# Altium PCB CC1101-Module.PcbDoc
Units mm, origin at the board's own origin, x right, y up, seen from the top; angles counter-clockwise.
Board outline 29.2 x 15.2 mm, 2 copper layers (Top Layer, Bottom Layer); 24 components, 19 nets, 80 pads, 47 vias.
Unrouted connection lines stored in the file: 23.
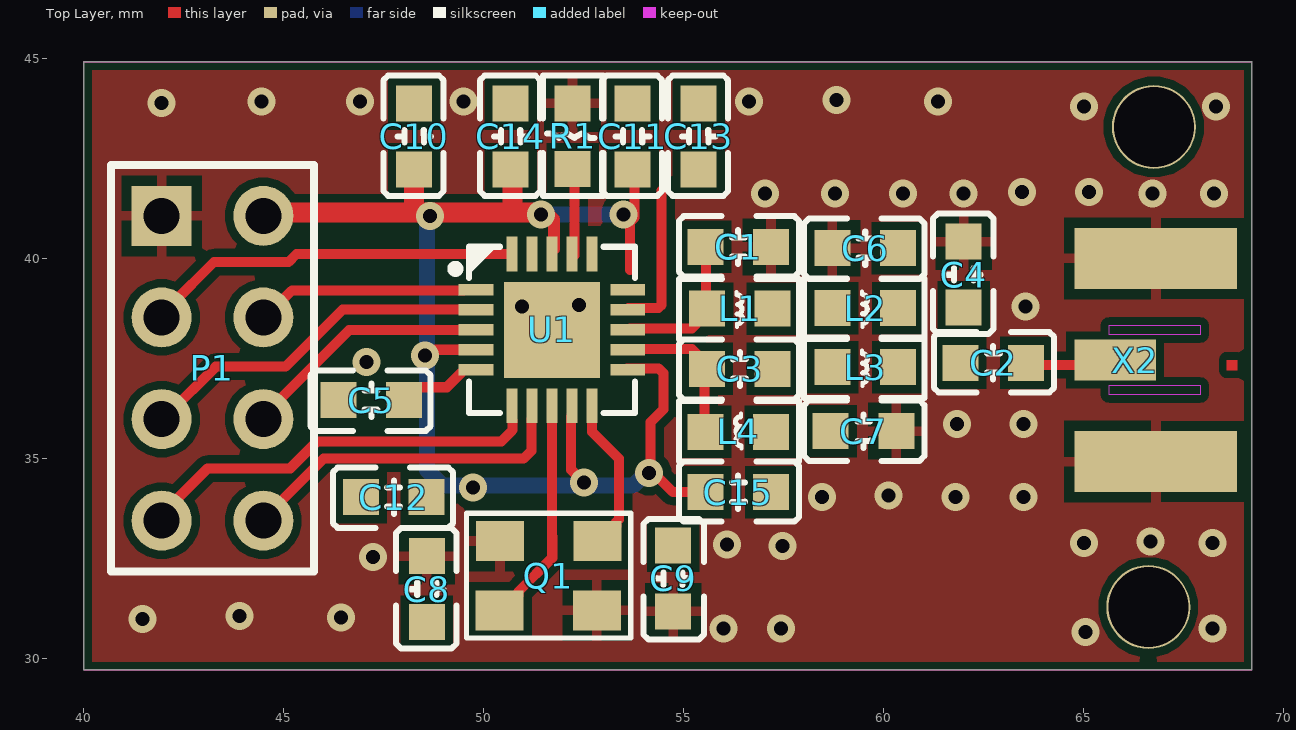
[diagram p0: Top Layer view]
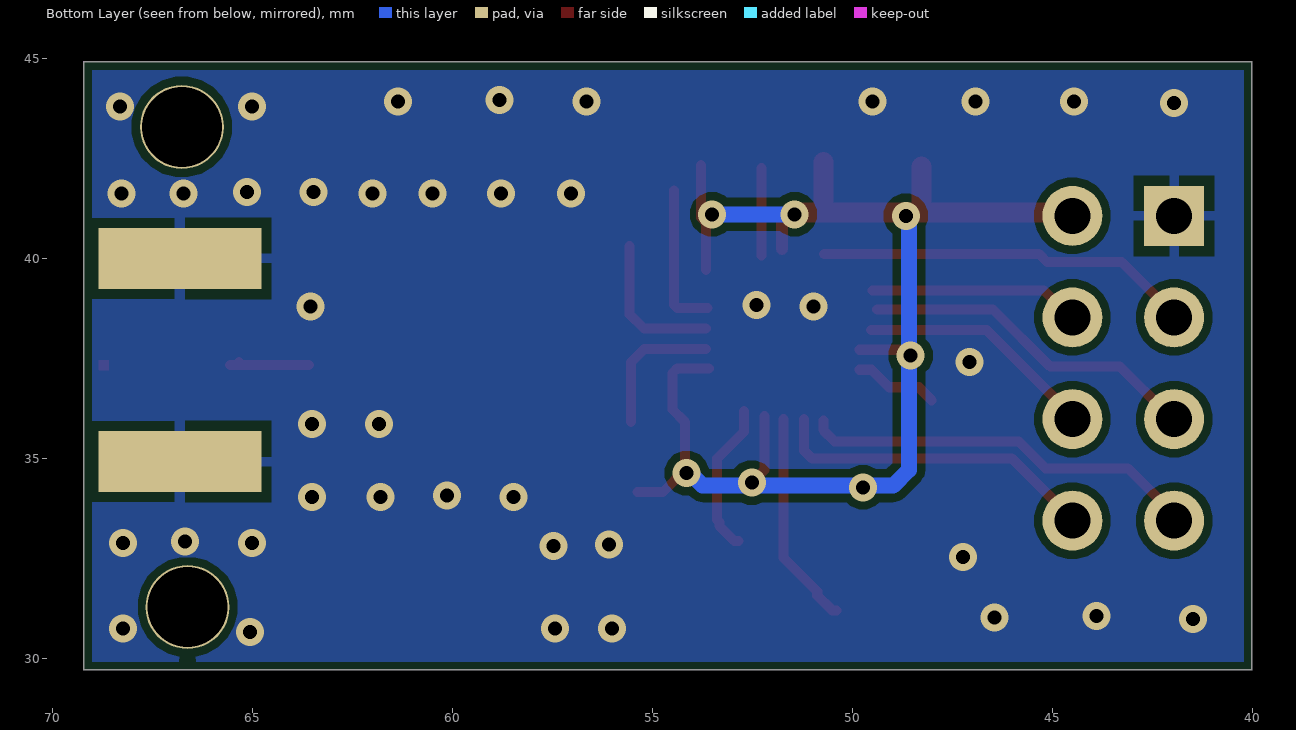
[diagram p1: Bottom Layer view, seen from below]

## Layer stack, top to bottom
Top Solder: solder mask 0.0102, Solder Resist, Dk 3.5
Top Layer: signal copper 0.0356
Dielectric 1: dielectric 0.32, FR-4, Dk 4.8
Bottom Layer: signal copper 0.0356
Bottom Solder: solder mask 0.0102, Solder Resist, Dk 3.5

## Board outline
40.004,29.718 40.004,44.918 40.005,44.919 69.205,44.919 69.206,44.918 69.206,29.718 69.205,29.717 40.005,29.717

## Design rules (kind name [scope] priority, off if disabled: settings)
Clearance [All] p1: gap=0.2 ignorepadtopadclearanceinfootprint=TRUE
PolygonConnect [All] p1: thpad.connectstyle=Relief thpad.reliefconductorwidth=0.254 thpad.reliefentries=4 thpad.polygonreliefangle="90 Angle" thpad.airgapwidth=0.254 smdpad.connectstyle=Relief smdpad.reliefconductorwidth=0.254 smdpad.reliefentries=4 smdpad.polygonreliefangle="90 Angle" smdpad.airgapwidth=0.254 via.connectstyle=Direct via.reliefconductorwidth=0.254 via.reliefentries=4 via.polygonreliefangle="90 Angle" via.airgapwidth=0.254
RoutingVias [All] p1: holewidth=0.711 width=1.27 viastyle="Through Hole" minholewidth=0.711 minwidth=1.27 maxholewidth=0.711 maxwidth=1.27
SolderMaskExpansion [All] p1: expansion=0.102 istentingtop=FALSE
SupplyNets "Schematic Supply Nets_1" [InNet('GND')] p1: voltage=0.000
SupplyNets "Schematic Supply Nets" [InNet('VCC')] p2: voltage=0.000
Width [All] p1: maxlimit=0.254 minlimit=0.254 preferedwidth=0.254
30 further rules are at their usual default settings.

## Components (designator, comment, footprint, x,y, rotation, side; value= is the part's Value field where it differs from the comment)
C1 "N.C" C0603 56.363,40.294 r180 top
C2 "N.C" C0603 62.737,37.394 r180 top
C3 "N.C" C0603 56.404,37.241 r0 top
C4 "N.C" C0603 62.001,39.601 r270 top
C5 "N.C" C0603 47.19,36.461 r0 top
C6 "N.C" C0603 59.536,40.259 r0 top
C7 "N.C" C0603 59.495,35.687 r180 top
C8 "N.C" C0603 48.578,31.739 r270 top
C9 "N.C" C0603 54.737,32.004 r90 top
C10 "N.C" C0603 48.26,43.053 r270 top
C11 "N.C" C0603 53.721,43.053 r270 top
C12 "N.C" C0603 47.752,34.036 r0 top
C13 "N.C" C0603 55.372,43.053 r270 top
C14 "N.C" C0603 50.673,43.053 r270 top
C15 "N.C" C0603 56.363,34.163 r180 top
L1 "10µH" INDC1608X06L 56.388,38.735 r0 top
L2 "10µH" INDC1608X06L 59.52,38.743 r0 top
L3 "10µH" INDC1608X06L 59.52,37.266 r0 top
L4 "10µH" INDC1608X06L 56.379,35.683 r180 top
P1 "Header 4X2" HDR2X4 41.95,41.069 r270 top
Q1 "MHz" 3225 51.619,32.072 r0 top
R1 "kΩ" R0603 52.242,43.069 r270 top
U1 "CC1101RGPT" QFN-20_L4.0-W4.0-P0.50-BL-EP2.4 51.705,38.22 r270 top
X2 "SMA-CONN" SMA_EDGELAUNCH_UFL 68.834,37.465 r180 top locked

## Footprints (in the part's own frame and the unit in brackets; to place one, negate y for a bottom-side part, rotate by r counter-clockwise, add the part's x,y. Pads: shape width x height; smd on the part's side, far side on the other; paste and mask are expansions set on the pad)
3225 [mm]
  rect 1.2x1 smd: 1(-1.223,-0.867) 2(1.21,-0.867) 3(1.223,0.867) 4(-1.21,0.867)
  silkscreen extent -2.04,-1.56 2.06,1.56, body extent -1.6,-1.25 1.6,1.25, height 0.61
C0603 [mm]
  rect 0.9x0.9 smd: 1(-0.821,0) 2(0.821,0)
  silkscreen extent -1.52,-0.77 1.48,0.74, body extent -0.86,-0.47 0.74,0.33, height 0.8
HDR2X4 [mm] "Connector; Header; 4x2 Position"
  rect 1.5x1.5 hole 0.9: 1(0,0)
  round 1.5 hole 0.9: 2(0,2.54) 3(2.54,0) 4(2.54,2.54) 5(5.08,0) 6(5.08,2.54) 7(7.62,0) 8(7.62,2.54)
  silkscreen extent -1.27,-1.27 8.89,3.81
INDC1608X06L [mm]
  rect 0.9x0.9 smd: 1(-0.804,0.017) 2(0.838,0.017)
  silkscreen extent -1.51,-0.75 1.5,0.76, body extent -0.8,-0.48 0.8,0.48, height 0.8
QFN-20_L4.0-W4.0-P0.50-BL-EP2.4 [mm]
  rect 0.28x0.87 smd paste+0 mask+0.051: 1(-1,-1.897) 2(-0.5,-1.897) 3(0,-1.897) 4(0.5,-1.897) 5(1,-1.897) 11(1,1.898) 12(0.5,1.898) 13(0,1.898) 14(-0.5,1.898) 15(-1,1.898)
  rect 0.87x0.28 smd paste+0 mask+0.051: 6(1.898,-1) 7(1.898,-0.5) 8(1.898,0) 9(1.898,0.5) 10(1.898,1) 16(-1.898,1) 17(-1.898,0.5) 18(-1.898,0) 19(-1.898,-0.5) 20(-1.898,-1)
  rect 2.4x2.4 smd paste+0 mask+0.051: 21(0,0)
  silkscreen extent -2.08,-2.51 2.08,2.08
R0603 [mm]
  rect 0.9x0.9 smd: 1(-0.812,-0.02) 2(0.83,-0.02)
  silkscreen extent -1.51,-0.76 1.5,0.75, body extent -1.07,-0.39 1.03,0.41, height 0.5
SMA_EDGELAUNCH_UFL [mil]
  rect 80x40 smd paste-40: F(120,0)
  rect 160x60 smd paste-80: GND(80,100) GND(80,-100)
  rect 160x60 smd far side paste-80: GND(80,100) GND(80,-100)
  Top Layer region: 0,0 10,0 10,10 0,10
  Top Layer region: 0,0 10,0 10,10 0,10
  Top Layer keep-out region: 36,25 36,34 126,34 126,25
  Top Layer keep-out region: 36,-34 36,-25 126,-25 126,-34
  body extent -367,-126 164,130, height 128

## Part data
C1 C2 C3 C4 C5 C6 C7 C8 C9 C10 C11 C12 C13 C14 C15: library part Cap_0603, "Capacitor, X5R, ±10%, 6.3V", Manufacturer=N.A., Part Number=C0603-N.C., Volts=6.3V, Artikkelnr Noca=20069060, Artikkelnr Simpro=N.A., Footprint Doc=0603, LatestRevisionDate=2009-11-23, Manufacturer Part Number=N.A., Pin Count=2, Published=2009-05-08, Publisher="Nordic Semiconductor"
L1 L2 L3 L4: library part IND_0603, "Inductor, 80mA, ±10%", 2nd source part number=178-6105, Manufacturer="Taiyo Yuden", Manufacturer Part Number=LBMF1608T100K, Part Number=L0603-10µ, Supplier part number=587-1714-1-ND, 2nd source Supplier=Farnell, Artikkelnr Noca=33029314, Artikkelnr Simpro=N.A., Datasheet=http://www.yuden.co.jp/ut/product/pdf/elb2_e.pdf, Footprint Doc=0603, LatestRevisionDate=2012-09-19, Note="LBMF1608T100K 10µH 80mA 0603", Pin Count=2, Published=2010-02-24, Publisher="Nordic Semiconductor", Supplier=Digi-Key
P1: "Header, 4-Pin, Dual row", LatestRevisionDate=17-Jul-2002, LatestRevisionNote="Re-released for DXP Platform.", Publisher="Altium Limited"
Q1: library part XTAL_3225, "XTAL SMD 3226,", Manufacturer="Epson Toyocom", Manufacturer Part Number=Q22FA12800025, Part Number=XTAL_SMD2016_32MHz_8pF_Epson, Supplier part number=171-2806, Artikkelnr Noca=N.A., Artikkelnr Simpro=N.A., Datasheet=http://www.epsondevice.com/docs/qd/en/DownloadServlet?id=ID000449, Footprint Doc=XTAL_2016, LatestRevisionDate=2014-11-27, Note="XTAL SMD 32.000MHz", Pin Count=4, Published=2012-03-09, Publisher="Nordic Semiconductor", Supplier=Farnell
R1: library part Res_0603, "Resistor, ±1%, 0.100W", Manufacturer=N.A., Part Number=R0603-N.C.Ω, Artikkelnr Noca=N.A., Artikkelnr Simpro=N.A., Footprint Doc=0603, LatestRevisionDate=2009-05-08, Manufacturer Part Number=N.A., Note="Chip Res", Pin Count=2, Published=2009-05-08, Publisher="Nordic Semiconductor"
U1: "500Kbps ISM SPI QFN-20-EP(4x4) RF Transceiver ICs ROHS", JLCPCB Part Class="Extended Part", Manufacturer=TI(德州仪器), Contributor=LCSC, Manufacturer Part=CC1101RGPT, nameAlias=Value, spicePre=U, spiceSymbolName=CC1101RGPT, Supplier=LCSC, Supplier Part=C2654650
X2: library part SMACONNECTOR_EDGE_UFL

## Free pads (board coordinates)
  round 2.1 hole 2: 1(66.614,31.289) 1(66.754,43.291)

## Via types
v1: diameter 0.7, hole 0.35, Top Layer to Bottom Layer, tented both sides, 47 vias

## Nets (pads, with @x,y where several pads share a name; then routed paths per layer and width w, separated by ;. In a path a pad name is that pad's centre, name@x,y a point inside that pad or via, vN(x,y) a via of type N, cw(c..) or ccw(c..) an arc to the next point about the centre after c; other vN are vias at no path point)
CSN: P1.8 U1.7 | length 7.7
  Top Layer w0.25: P1.8@44.847,33.846 45.998,34.996 50.998,34.996 51.197,35.195 U1.7@51.197,35.989
GDO0: P1.7 U1.6 | length 9.5
  Top Layer w0.25: P1.7@42.227,33.885 43.101,34.758 45.164,34.758 45.839,35.433 50.443,35.433 50.721,35.711 U1.6@50.721,35.949
GDO2: P1.6 U1.3 | length 5.5
  Top Layer w0.25: P1.6@44.807,36.386 46.633,38.211 U1.3@49.53,38.211
GND: C1.1 C4.1 C5.1 C6.1 C7.1 C8.1 C9.1 C10.1 C11.1 C12.1 C13.1 C14.1 C15.1 P1.1 Q1.2 Q1.4 R1.1 U1.16 U1.19 X2.GND
  other v1: 65.048,30.67 55.999,30.75 57.428,30.75 68.223,30.75 41.473,30.988 46.434,31.028 43.894,31.067 47.228,32.536 57.468,32.814 56.078,32.853 65.008,32.893 68.223,32.893 66.675,32.933 58.46,34.044 61.793,34.044 63.5,34.044 60.127,34.084 61.833,35.87 63.5,35.87 47.069,37.417 50.959,38.806 63.54,38.806 52.387,38.846 57.031,41.624 58.777,41.624 60.484,41.624 61.992,41.624 66.715,41.624 68.263,41.624 63.46,41.664 65.127,41.664 65.008,43.807 68.302,43.807 41.95,43.886 44.45,43.926 46.911,43.926 49.49,43.926 56.634,43.926 61.357,43.926 58.817,43.966
MISO: P1.5 U1.2 | length 8.3
  Top Layer w0.25: P1.5@42.108,36.108 43.299,37.298 45.045,37.298 46.474,38.727 49.371,38.727
MOSI: P1.3 U1.20 | length 9.1
  Top Layer w0.25: P1.3@42.188,38.806 42.188,38.846 43.259,39.918 45.125,39.918 45.323,40.116 49.728,40.116
  Top Layer w0.254: 49.728,40.116 50.704,40.116 U1.20
NetC1_2: C1.2 L1.1 U1.13 | length 3.8
  Top Layer w0.25: U1.13@53.657,38.251 55.205,38.251 55.562,38.608 C1.2@55.562,40.315
NetC2_1: C2.1 X2.F | length 2.1
  Top Layer w0.25: C2.1@63.579,37.338 X2.F@65.546,37.338 ; X2.F@65.246,37.338 X2.F@65.326,37.417
NetC2_2: C2.2 C4.2 L3.2
NetC3_1: C3.1 L4.2 U1.12 | length 3.5
  Top Layer w0.25: U1.12@53.657,37.735 55.205,37.735 55.523,37.417 L4.2@55.523,35.909
NetC3_2: C3.2 L1.2 L2.1
NetC5_2: C5.2 U1.5 | length 2.1
  Top Layer w0.254: C5.2 48.334,36.784 49.077,36.784 49.513,37.22 U1.5
NetC6_2: C6.2 L2.2 L3.1
NetC7_2: C7.2 L4.1
NetC8_2: C8.2 Q1.1 U1.8 | length 5.4
  Top Layer w0.25: 51.713,33.052 U1.8@51.713,35.989
  Top Layer w0.254: Q1.1 50.496,31.205 50.869,31.578 50.869,31.678 51.713,32.522 51.713,33.052
NetC9_2: C9.2 Q1.3 U1.10 | length 4.4
  Top Layer w0.25: U1.10@52.705,36.187 52.705,35.671 53.38,34.996 53.38,33.476
  Top Layer w0.254: Q1.3 52.942,32.939 53.315,33.312 53.315,33.412 53.38,33.476 53.38,34.044
NetR1_2: R1.2 U1.17
SCLK: P1.4 U1.1 | length 4.8
  Top Layer w0.25: P1.4@44.847,38.846 45.204,39.203 U1.1@49.49,39.203
VCC: C10.2 C11.2 C12.2 C13.2 C14.2 C15.2 P1.2 U1.4 U1.9 U1.11 U1.14 U1.15 U1.18 | length 38.5
  Top Layer w0.25: U1.9@52.189,36.068 52.189,34.719 v1@52.467,34.441 ; U1.11@53.578,37.259 54.372,37.259 54.491,37.14 54.491,36.227 54.173,35.909 54.173,34.719 54.729,34.163 C15.2@55.364,34.163 ; U1.14@53.618,38.767 54.372,38.767 54.451,38.846 54.451,41.704 ; 53.657,39.719 53.657,40.91 53.777,41.029 C11.2@53.777,42.339
  Top Layer w0.254: v1(48.538,37.576) 48.658,37.576 48.802,37.72 U1.4
  Top Layer w0.3: v1@51.514,41.108 51.633,41.108 51.752,40.989 U1.18@51.752,40.235
  Top Layer w0.5: P1.2@45.006,41.148 v1@51.475,41.148 ; 48.26,41.188 C10.2@48.26,42.299 ; C14.2@50.721,42.418 50.721,41.188 50.76,41.148
  Bottom Layer w0.4: v1@48.578,40.95 48.578,34.719 48.974,34.322 53.737,34.322 v1@54.094,34.679 ; v1(51.435,41.108) v1(53.499,41.108) v1@53.538,41.148
  other v1: 49.728,34.282 52.507,34.401 54.134,34.639 48.657,41.069
pads on no net: U1.21
copper on no net: | length 179.8
  Top Layer w0.002: 40.005,29.718 40.005,44.918 69.205,44.918 69.205,29.718 40.005,29.718
  Top Layer w0.25: 52.268,40.076 52.268,42.259
  Bottom Layer w0.002: 40.005,29.718 40.005,44.918 69.205,44.918 69.205,29.718 40.005,29.718

## Polygon pours and split planes (outlines as drawn)
GND on Bottom Layer "NONET_L02_P-001" (solid, remove dead copper, pour order 0): 40.005,29.718 69.205,29.718 69.205,44.918 40.005,44.918
GND on Top Layer "NONET_L02_P-001" (solid, remove dead copper, pour order 1): 40.005,29.718 69.205,29.718 69.205,44.918 40.005,44.918

## Keep-outs
Keep-Out Layer:
  the board outline again, w0.002